# Altium PCB PD_v5.PcbDoc
Units mil, origin at the board's own origin, x right, y up, seen from the top; angles counter-clockwise.
Board outline 3309.8 x 1465 mil, 4 copper layers (Top Layer, VCC_3V3, VCC_1V2, Bottom Layer), stack 23.756 mil thick; 64 components, 57 nets, 236 pads, 225 vias.
Unrouted connection lines stored in the file: 171.
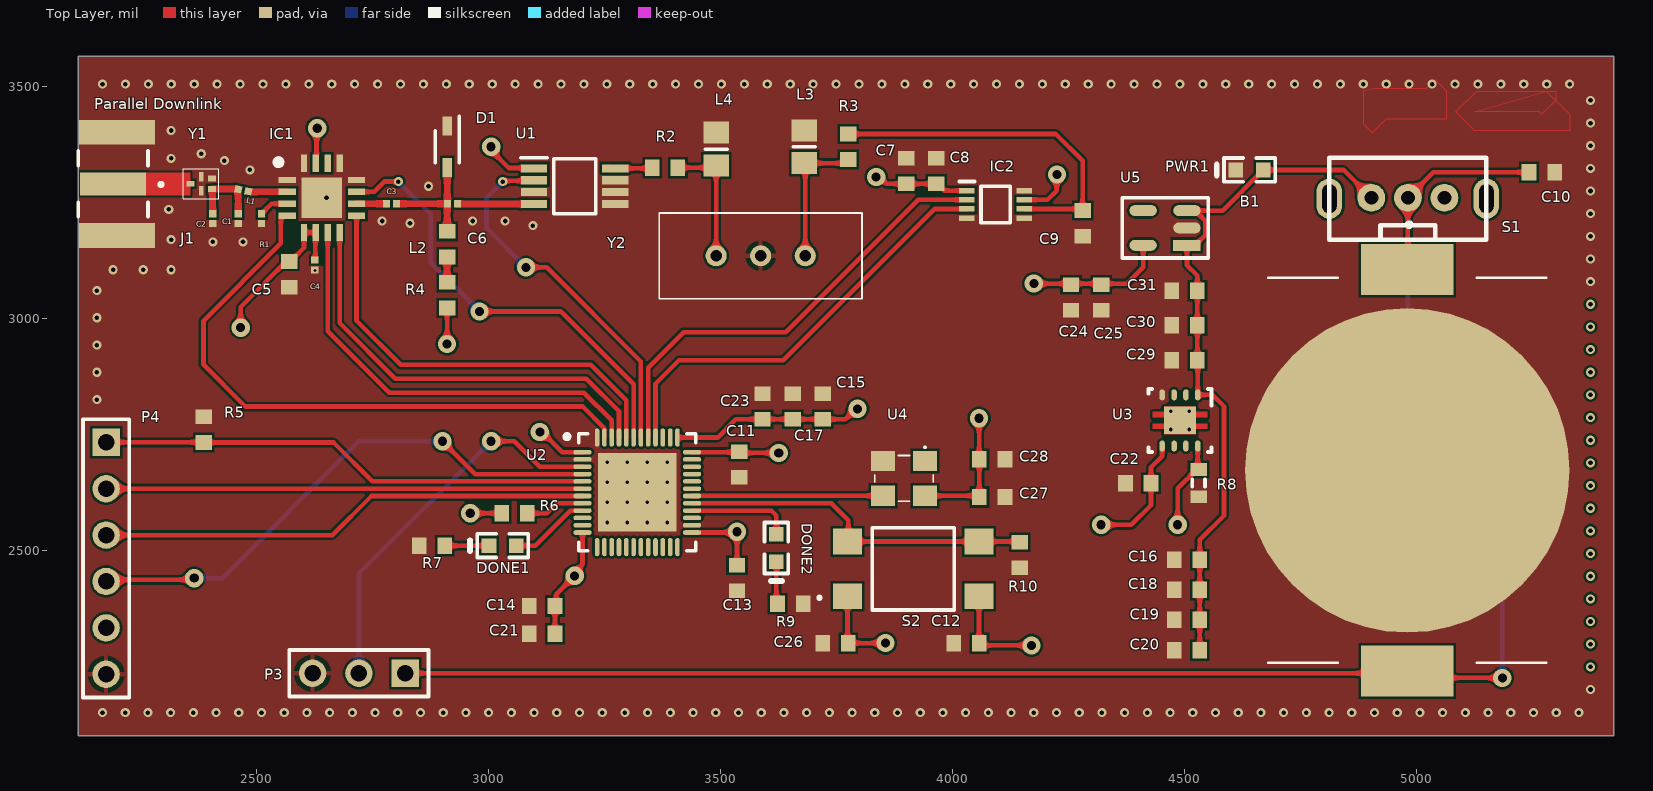
[diagram p0: Top Layer view]
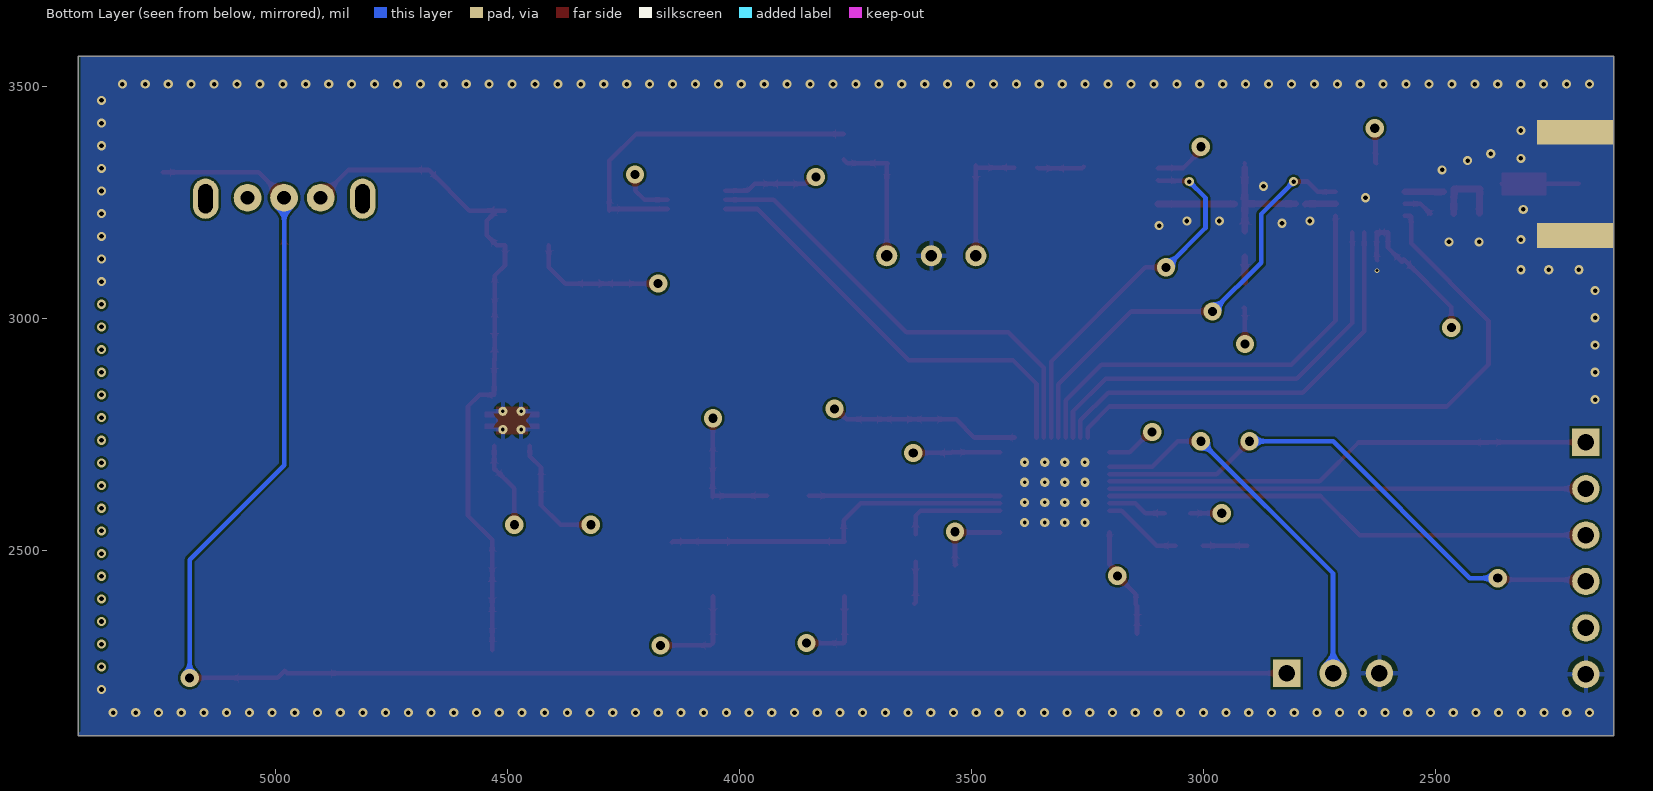
[diagram p1: Bottom Layer view, seen from below]
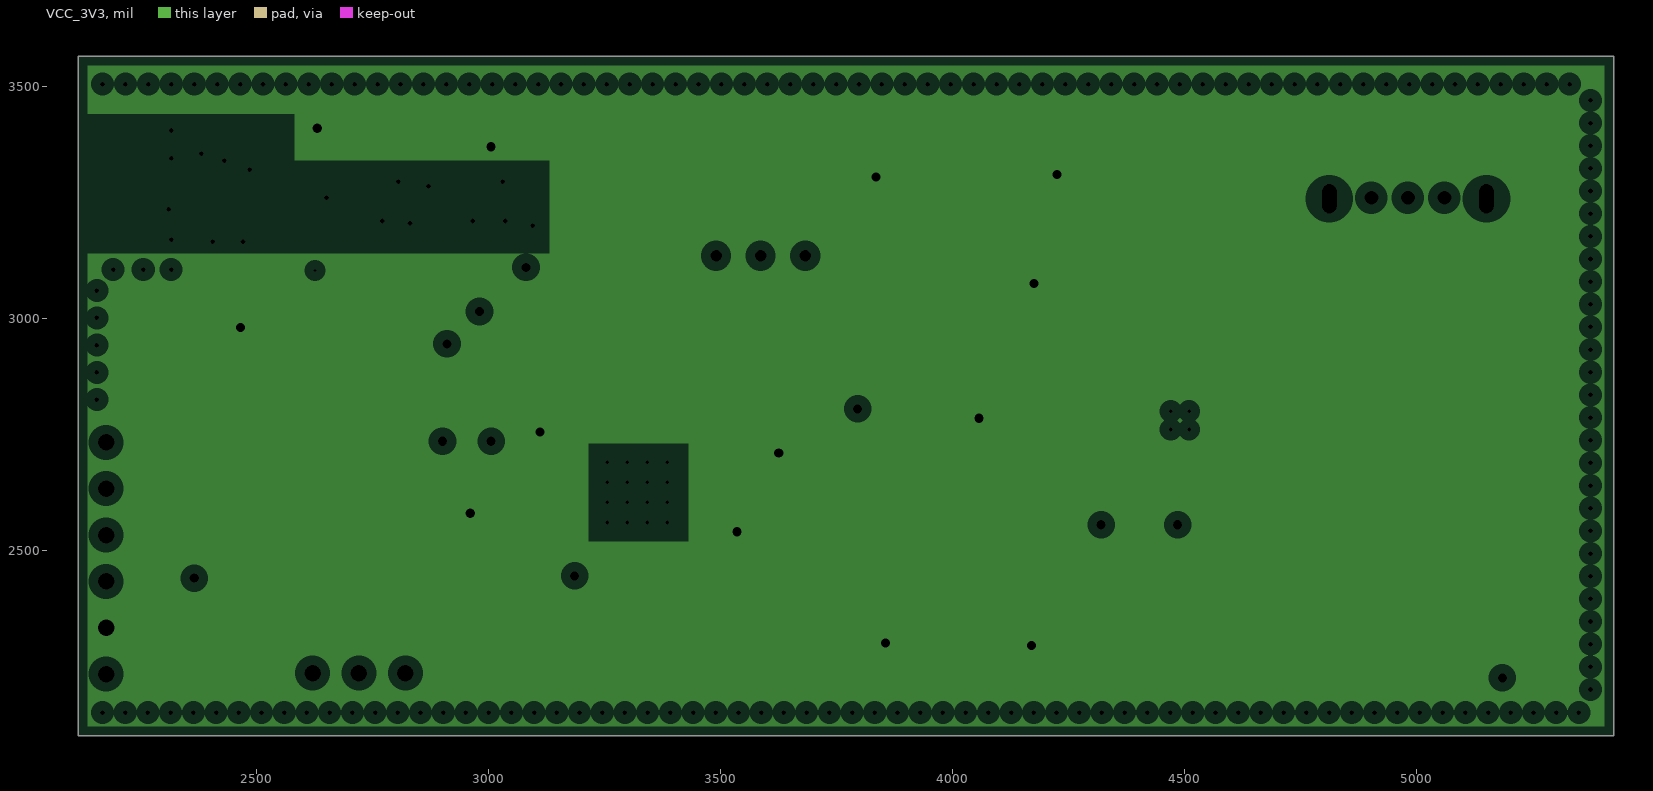
[diagram p2: VCC_3V3, clearances drawn from the general rule]
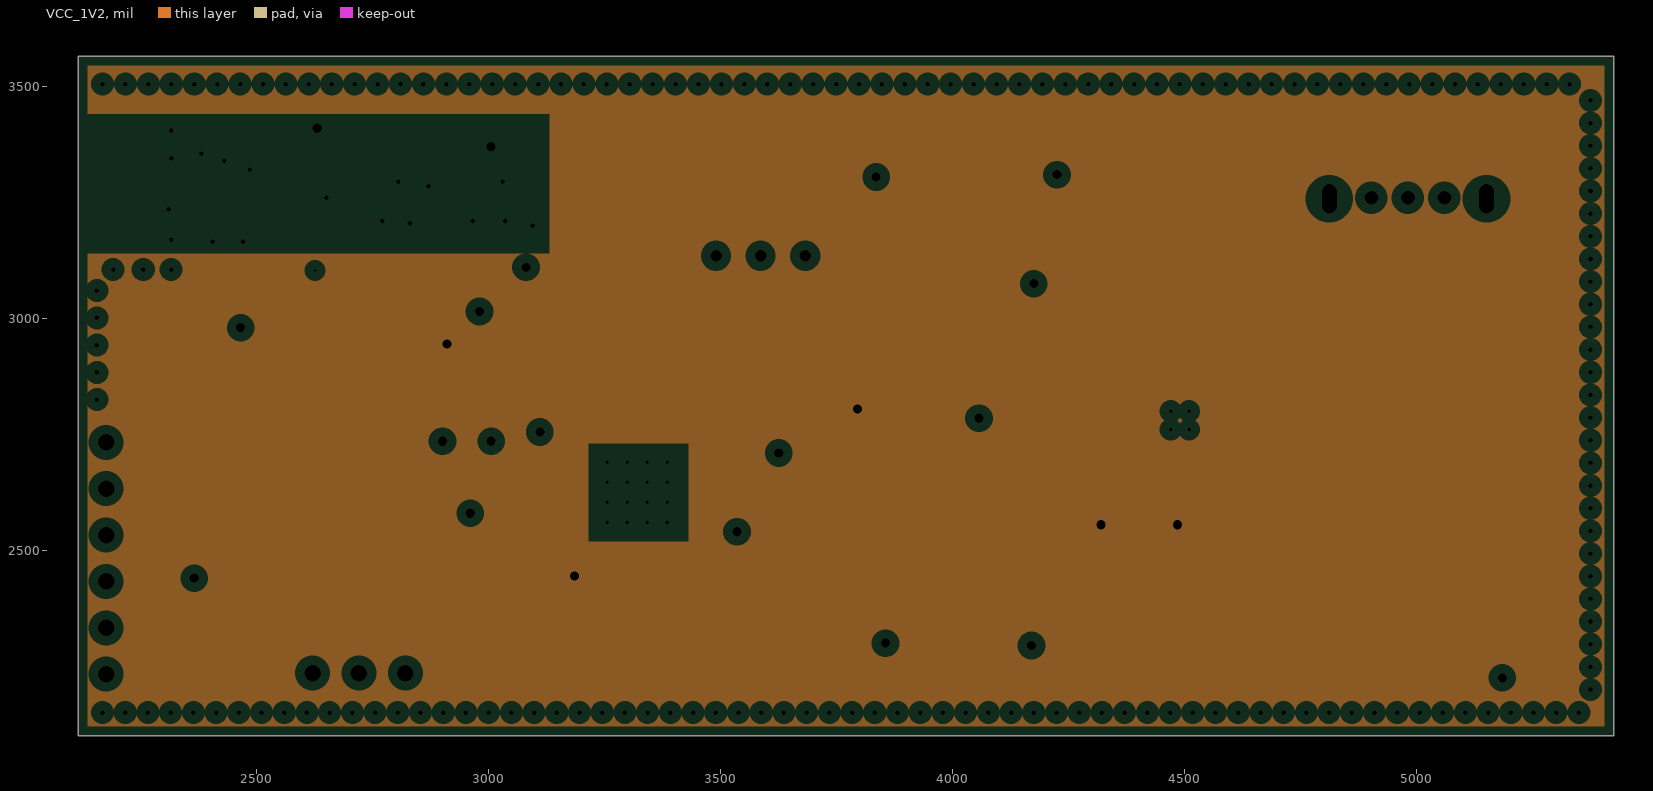
[diagram p3: VCC_1V2, clearances drawn from the general rule]

## Layer stack, top to bottom
Top Solder: solder mask 0.4, Solder Resist, Dk 3.5
Top Layer: signal copper 1.4
Dielectric 1: prepreg 2.8, PP-006, Dk 4.1
VCC_3V3: plane copper 1.378, net 3V3
Dielectric 2: dielectric 12.6, FR-4, Dk 4.8
VCC_1V2: plane copper 1.378, net 1V2
Dielectric 3: prepreg 2.8, PP-006, Dk 4.1
Bottom Layer: signal copper 1.4
Bottom Solder: solder mask 0.4, Solder Resist, Dk 3.5

## Board outline
2115.2,2100 2115.2,3565 5425,3565 5425,2100

## Design rules (kind name [scope] priority, off if disabled: settings)
Clearance Clearance_BD [InNetClass('RF')] p1: gap=3 ignorepadtopadclearanceinfootprint=TRUE
Clearance Clearance_1 [All] p2: gap=5 ignorepadtopadclearanceinfootprint=TRUE except(0: Arc-Hole Track-Hole SMDPad-Region SMDPad-Hole THPad-Region THPad-Hole Via-Hole Fill-Hole Poly-Hole Region-Hole Text-Hole)
HoleToHoleClearance [All] p1: gap=5 allowstackedmicrovias=TRUE
MinimumSolderMaskSliver [All] p1: minsoldermaskwidth=1
PlaneClearance [All] p1: clearance=20
PlaneConnect [All] p1: planeconnectstyle=Relief reliefexpansion=20 reliefentries=4 reliefconductorwidth=10 reliefairgap=10
PolygonConnect [All] p1: thpad.connectstyle=Relief thpad.reliefconductorwidth=10 thpad.reliefentries=4 thpad.polygonreliefangle="90 Angle" thpad.airgapwidth=10 smdpad.connectstyle=Direct smdpad.reliefconductorwidth=10 smdpad.reliefentries=4 smdpad.polygonreliefangle="90 Angle" smdpad.airgapwidth=10 via.connectstyle=Direct via.reliefconductorwidth=10 via.reliefentries=4 via.polygonreliefangle="90 Angle" via.airgapwidth=10
RoutingCorners [All] p1: cornerstyle=Round minsetback=100 maxsetback=100
RoutingVias [All] p1: holewidth=9.84 width=19.68 viastyle="Through Hole" minholewidth=9.84 minwidth=19.68 maxholewidth=28 maxwidth=50
SilkToSilkClearance [All] p1: silktosilkclearance=5
SilkToSolderMaskClearance [IsPad] p1: minsilkscreentomaskgap=0 clearancetoexposedcopper=TRUE
SolderMaskExpansion [All] p1: expansion=4 istentingtop=FALSE
UnRoutedNet [All] p1: checkbadconnections=TRUE
Width [All] p1: maxlimit=70 minlimit=10 preferedwidth=10 minimp=50.000000 maximp=50.000000 favimp=50.000000
22 further rules are at their usual default settings.

## Classes and differential pairs
component class io_bank: B1 C10 C11 C12 C13 C14 C15 C16 C17 C18 C19 C20 C21 C22 C23 C24 C25 C26 C27 C28 C29 C30 C31 DONE1 DONE2 P3 P4 PWR1 R5 R6 R7 R8 R9 R10 S1 S2 U2 U3 U4 U5
component class PD_v5: C1 C2 C3 C4 C5 C6 C7 C8 C9 D1 IC1 IC2 J1 L1 L2 L3 L4 R1 R2 R3 R4 U1 Y1 Y2

## Components (designator, comment, footprint, x,y, rotation, side; value= is the part's Value field where it differs from the comment)
B1 "BK-912-TR" MPD_BK-912-TR 4980,2672.52 r270 top
C1 "陶瓷电容" CAPC0603X33N 2460,3215 r90 top value=0.9pF
C2 "陶瓷电容" CAPC0603X33N 2405,3215 r90 top value=0.3pF
C3 "陶瓷电容" CAPC0603X33N 2790.16,3246.97 r0 top value=1pF
C4 "陶瓷电容" CAPC0603X33N 2625,3115 r90 top value=100nF
C5 "陶瓷电容" 1608[0603] 2570,3095 r270 top value=10uF
C6 "陶瓷电容" CAPC0603X33N 2921.62,3246.97 r0 top value=40pF
C7 "陶瓷电容" 1608[0603] 3900,3317.56 r90 top value=1uF
C8 "陶瓷电容" 1608[0603] 3965,3317.56 r90 top value=0.1uF
C9 "陶瓷电容" 1608[0603] 4280,3205 r270 top value=1.5nF
C10 "Cap" 1608[0603] 5270,3315 r180 top value=10uF
C11 "0.1μF" 1608[0603] 3540,2685 r90 top value=100pF
C12 "0.1μF" 1608[0603] 4030,2300 r0 top value=100pF
C13 "0.1μF" 1608[0603] 3535,2440 r90 top value=100pF
C14 "4.7μF" 1608[0603] 3115,2380 r0 top value=100pF
C15 "4.7μF" 1608[0603] 3720,2810 r270 top value=100pF
C16 "0.1μF" 1608[0603] 4505,2480 r0 top value=100pF
C17 "0.47μF" 1608[0603] 3655,2810 r270 top value=100pF
C18 "10μF" 1608[0603] 4505,2415 r0 top value=100pF
C19 "0.1μF" 1608[0603] 4505,2350 r0 top value=100pF
C20 "0.01μF" 1608[0603] 4505,2285 r0 top value=100pF
C21 "0.1μF" 1608[0603] 3115,2320 r0 top value=100pF
C22 "0.01μF" 1608[0603] 4400,2645 r0 top value=100pF
C23 "10μF" 1608[0603] 3590,2810 r270 top value=100pF
C24 "0.01μF" 1608[0603] 4255,3045 r90 top value=100pF
C25 "0.1μF" 1608[0603] 4320,3045 r90 top value=100pF
C26 "0.01μF" 1608[0603] 3747.44,2300 r0 top value=100pF
C27 "0.1μF" 1608[0603] 4085.12,2615 r180 top value=100pF
C28 "10μF" 1608[0603] 4085.12,2695.87 r180 top value=100pF
C29 "10μF" 1608[0603] 4500,2910 r0 top value=100pF
C30 "0.1μF" 1608[0603] 4500,2985 r0 top value=100pF
C31 "0.01μF" 1608[0603] 4500,3060 r0 top value=100pF
D1 "BAT1503WE6327" SOD2513X110N 2910.41,3370.26 r270 top
DONE1 "绿灯 0603" 0603_LED 3030,2510 r0 top
DONE2 "绿灯 0603" 0603_LED 3620,2505 r90 top
IC1 "nRF21540-QDAA-R" QFN65P400X400X90-17N-D 2640,3260 r0 top
IC2 "ADS7040IDCUR" SOP50P310X90-8N 4092.69,3245.79 r0 top
J1 "SMA-J-P-H-ST-EM1" SAMTEC_SMA-J-P-H-ST-EM1 2190,3290 r270 top
L1 "Inductor" CAPC0603X33N 2470.63,3275.82 r348 top value=1.9nH
L2 "Inductor" 1608[0603] 2910,3160 r270 top value=10.0uH
L3 "Inductor" 6-0805_N 3680,3370 r90 top value=10uH
L4 "Inductor" 6-0805_N 3490,3365 r90 top value=4.7uH
P3 "Header 3" HDR1X3 2820,2235 r180 top
P4 "Header 6" HDR1X6 2175,2732.87 r270 top
PWR1 "红灯 0603" 0603_LED 4640,3320 r0 top
R1 "电阻" CAPC0603X33N 2510,3215 r90 top value=50
R2 "电阻" 1608[0603] 3380,3325 r180 top value=0
R3 "电阻" 1608[0603] 3775,3370 r270 top value=0
R4 "电阻" 1608[0603] 2910,3050 r90 top value=700
R5 "4.7k" 1608[0603] 2385,2760 r270 top value=1K
R6 "4.7k" 1608[0603] 3055,2580 r0 top value=1K
R7 "1k Ohm" 1608[0603] 2877.44,2510 r0 top value=1k
R8 "Res3" J1-0603 4530,2645 r270 top value=1M
R9 "1k Ohm" 1608[0603] 3650,2385 r180 top value=1k
R10 "1k Ohm" 1608[0603] 4145,2490 r90 top value=1M
S1 "SW-SPDT" SW_SPDT 4981.26,3260 r180 top
S2 "TL3305AF160QG" TL3305AF160QG 3915,2460 r0 top
U1 "ADG902BRMZ" SOP65P490X110-8N 3185,3285 r0 top
U2 "GW1N-LV4QN48C6" QFN40P600X600X60_HS-49N 3320,2625 r0 top
U3 "TPS715A01DRBR" DRB0008A 4490,2780 r270 top
U4 "ASTX_H11_20MHz" ASTXH1124576MHZT 3895,2660 r180 top
U5 "TPS73633" TPS73633 4505,3157.6 r180 top
Y1 "TA2238A" TA2238A 2356.87,3290.26 r0 top
Y2 "ECS-10.7-7.5B" ECS10775A 3490,3135 r0 top

## Footprints (in the part's own frame and the unit in brackets; to place one, negate y for a bottom-side part, rotate by r counter-clockwise, add the part's x,y. Pads: shape width x height; smd on the part's side, far side on the other; paste and mask are expansions set on the pad)
6-0805_N [mm] "Chip Resistor, Body 2.0x1.2mm, IPC Medium Density"
  rect 1.2x1.4 smd: 1(-0.9,0) 2(0.9,0)
  silkscreen extent 0,-0.6 0,0.6, body extent -1.07,-0.7 1.07,0.7, height 0.7
0603_LED [mm]
  rect 0.8x0.8 smd: A(0.75,0) K(-0.75,0)
  silkscreen extent -1.8,-0.65 1.4,0.65
1608[0603] [mm] "Chip Capacitor, Body 1.6x0.8mm, IPC High Density"
  rect 0.8x0.9 smd: 1(-0.7,0) 2(0.7,0)
  body extent -0.87,-0.48 0.87,0.48, height 1.3
ASTXH1124576MHZT [mm]
  rect 1.3x1.1 smd: 1(-1.15,-0.825) 2(1.15,-0.825) 3(1.15,1.075) 4(-1.15,1.075)
  silkscreen extent -1.6,-1.62 1.6,1.38, body extent -1.69,-1.26 1.69,1.52, height 1.1
CAPC0603X33N [mm]
  rect 0.39x0.4 smd: 1(-0.272,0) 2(0.272,0)
DRB0008A [mm]
  oval 0.6x0.3 smd paste+0 mask+0.051: 1(-1.4,0.975) 2(-1.4,0.325) 3(-1.4,-0.325) 4(-1.4,-0.975) 5(1.4,-0.975) 6(1.4,-0.325) 7(1.4,0.325) 8(1.4,0.975)
  rect 1.5x1.75 smd paste-0.862 mask+0.051: 9(0,0)
  round 0.5 hole 0.203 mask+0.051: V(-0.5,0.5) V(-0.5,-0.5) V(0.5,0.5) V(0.5,-0.5)
  Top Layer region: -0.185,-1.5 -0.465,-1.5 -0.465,-0.875 -0.75,-0.875 -0.75,0.875 -0.465,0.875 -0.465,1.5 -0.185,1.5 -0.185,0.875 0.185,0.875 0.185,1.5 0.465,1.5 0.465,0.875 0.75,0.875 0.75,-0.875 0.465,-0.875 0.465,-1.5 0.185,-1.5 0.185,-0.875 -0.185,-0.875
  silkscreen extent -1.73,-1.73 1.73,1.73, body extent 0,0 0.25,0.25, height 0.25
ECS10775A [mm]
  round 1.155 hole 0.63: 1(0,0) 2(2.44,0) 3(4.88,0)
  silkscreen extent -3.11,-2.35 7.99,2.35, body extent -3.11,-2.35 7.99,2.35, height 11.3
HDR1X3 [mm] "Connector; Header; 3 Position"
  rect 1.5x1.5 hole 0.9: 1(0,0)
  round 1.5 hole 0.9: 2(2.54,0) 3(5.08,0)
  silkscreen extent -1.27,-1.27 6.35,1.27
HDR1X6 [mm] "Connector; Header; 6 Position"
  rect 1.5x1.5 hole 0.9: 1(0,0)
  round 1.5 hole 0.9: 2(2.54,0) 3(5.08,0) 4(7.62,0) 5(10.16,0) 6(12.7,0)
  silkscreen extent -1.27,-1.27 13.97,1.27
J1-0603 [mm] "Chip Resistor, Body 1.6x0.8mm, IPC High Density"
  rect 0.7x0.9 smd: 1(-0.75,0) 2(0.75,0)
  silkscreen extent -0.2,-0.35 0.2,0.35, body extent -0.85,-0.48 0.85,0.48, height 0.9
MPD_BK-912-TR [mm]
  rect 2.79x5.08 smd: 1(-10.985,0) 2(10.985,0)
  round 17.78 smd: 3(0,0)
  silkscreen extent -13.59,-7.62 10.54,7.62, body extent -11.43,-7.62 11.43,7.8
QFN40P600X600X60_HS-49N [mm] "QFN, 48-Leads, Body 6.00x6.00mm, Pitch 0.40mm, Thermal Pad 4.63x4.63mm, IPC Medium Density"
  oval 1x0.25 smd: 1(-3,2.2) 2(-3,1.8) 3(-3,1.4) 4(-3,1) 5(-3,0.6) 6(-3,0.2) 7(-3,-0.2) 8(-3,-0.6) 9(-3,-1) 10(-3,-1.4) 11(-3,-1.8) 12(-3,-2.2) 25(3,-2.2) 26(3,-1.8) 27(3,-1.4) 28(3,-1) 29(3,-0.6) 30(3,-0.2) 31(3,0.2) 32(3,0.6) 33(3,1) 34(3,1.4) 35(3,1.8) 36(3,2.2)
  oval 0.25x1 smd: 13(-2.2,-3) 14(-1.8,-3) 15(-1.4,-3) 16(-1,-3) 17(-0.6,-3) 18(-0.2,-3) 19(0.2,-3) 20(0.6,-3) 21(1,-3) 22(1.4,-3) 23(1.8,-3) 24(2.2,-3) 37(2.2,3) 38(1.8,3) 39(1.4,3) 40(1,3) 41(0.6,3) 42(0.2,3) 43(-0.2,3) 44(-0.6,3) 45(-1,3) 46(-1.4,3) 47(-1.8,3) 48(-2.2,3)
  rect 4.3x4.3 smd: 49(0,0)
  silkscreen extent -3.97,-3.2 3.2,3.2, body extent -3.05,-3.05 3.05,3.05, height 0.6
QFN65P400X400X90-17N-D [mm]
  rect 0.95x0.35 smd: 1(-1.9,0.975) 2(-1.9,0.325) 3(-1.9,-0.325) 4(-1.9,-0.975) 9(1.9,-0.975) 10(1.9,-0.325) 11(1.9,0.325) 12(1.9,0.975)
  rect 0.35x0.95 smd: 5(-0.975,-1.9) 6(-0.325,-1.9) 7(0.325,-1.9) 8(0.975,-1.9) 13(0.975,1.9) 14(0.325,1.9) 15(-0.325,1.9) 16(-0.975,1.9)
  rect 2.2x2.2 smd: 17(0,0)
  silkscreen extent -2.54,1.79 -2.21,2.11, body extent -2.05,-2.05 2.05,2.05, height 0.9
SAMTEC_SMA-J-P-H-ST-EM1 [mm]
  rect 1.27x3.6 smd: 1(0,0)
  rect 1.35x4.2 smd: 2_1(-2.825,0.2) 3_1(2.825,0.2)
  rect 1.35x4.2 smd far side: 2_2(-2.825,0.2) 3_2(2.825,0.2)
  silkscreen extent -1.8,-1.9 1.8,2.72
SOD2513X110N [mm]
  rect 1.05x0.5 smd: 1(-1.138,0) 2(1.138,0)
  silkscreen extent -1.66,-0.65 0.87,0.65, body extent -1.25,-0.65 1.25,0.65, height 1.1
SOP50P310X90-8N [mm]
  rect 0.85x0.3 smd: 1(-1.575,0.75) 2(-1.575,0.25) 3(-1.575,-0.25) 4(-1.575,-0.75) 5(1.575,-0.75) 6(1.575,-0.25) 7(1.575,0.25) 8(1.575,0.75)
  silkscreen extent -2,-1 0.8,1.25, body extent -1.55,-1 1.55,1, height 0.77
SOP65P490X110-8N [mm]
  rect 1.45x0.45 smd: 1(-2.225,0.975) 2(-2.225,0.325) 3(-2.225,-0.325) 4(-2.225,-0.975) 5(2.225,-0.975) 6(2.225,-0.325) 7(2.225,0.325) 8(2.225,0.975)
  silkscreen extent -2.95,-1.5 1.15,1.55, body extent -2.45,-1.5 2.45,1.5, height 1.1
SW_SPDT [mm]
  oval 1.4x2.2 hole 0.8 slot 1.6 at 90 deg: 0(-4.3,0.05) 0(4.3,0.05)
  round 1.524 hole 0.762: 1(-2,0) 2(0,0) 3(2,0)
  silkscreen extent -4.3,-2.2 4.3,2.3, body extent -4.25,-1.9 4.25,1.8, height 6.5
TA2238A [mm] "TA2238A"
  rect 0.425x0.325 smd: 1(0,0) 4(1.175,0.288) 5(1.175,-0.288)
  rect 0.25x0.525 smd: 2(0.587,0.387) 3(0.587,-0.387)
  silkscreen extent -0.4,-0.82 1.55,0.82
TL3305AF160QG [mm]
  rect 1.6x1.4 smd: 1(-3.6,-1.5) 2(3.6,-1.5) 3(-3.6,1.5) 4(3.6,1.5)
  silkscreen extent -5.21,-2.25 2.25,2.25
TPS73633 [mm]
  rect 1.5x0.6 smd: 1(0,0)
  oval 1.5x0.6 smd: 2(0,-0.95) 3(0,-1.9) 4(2.4,-1.9) 5(2.4,0)
  silkscreen extent -1.17,-2.6 3.55,0.7

## Part data
B1: "No Description Available", VALUE_2=Value, Built_By=EMA_Cory, Copyright="Copyright (C) 2018 Accelerated Designs. All rights reserved", Datasheet=https://www.memoryprotectiondevices.com/datasheets/BK-912-datasheet.pdf, Manufacturer_Part_Number=BK-912-TR, RefDes=RefDes, SourceLibrary=Memory_Protection_Devices_2020-01-22, Type=DEV, Vendor="Memory Protection Devices, Inc"
C1 C2 C3 C4 C5 C6 C7 C8 C9: "Capacitor (Semiconductor SIM Model)", LatestRevisionDate=29-May-2009, LatestRevisionNote="IPC-7351 Footprint Added.", PackageDescription="Chip Capacitor", PackageReference=C1206, Published=8-Jun-2000, Publisher="Altium Limited"
C10: "Capacitor", LatestRevisionDate=17-Jul-2002, LatestRevisionNote="Re-released for DXP Platform.", PackageDescription="Radial Cap, Thru-Hole; 2 Leads; 0.3 in Pin Spacing", PackageReference=RAD-0.3, Published=8-Jun-2000, Publisher="Altium Limited"
C11 C12 C13 C14 C15 C16 C17 C19 C21 C25 C27 C30: library part CAP_2, "MLCCs", LatestRevisionDate=17-Jul-2002, LatestRevisionNote="Re-released for DXP Platform.", PackageDescription="Radial Cap, Thru-Hole; 2 Leads; 0.3 in Pin Spacing", PackageReference=RAD-0.3, Published=8-Jun-2000, Publisher="Altium Limited"
C18 C23 C28 C29: library part CAP_4, "MLCCs", LatestRevisionDate=17-Jul-2002, LatestRevisionNote="Re-released for DXP Platform.", PackageDescription="Radial Cap, Thru-Hole; 2 Leads; 0.3 in Pin Spacing", PackageReference=RAD-0.3, Published=8-Jun-2000, Publisher="Altium Limited"
C20 C22 C24 C26 C31: library part CAP_3, "MLCCs", LatestRevisionDate=17-Jul-2002, LatestRevisionNote="Re-released for DXP Platform.", PackageDescription="Radial Cap, Thru-Hole; 2 Leads; 0.3 in Pin Spacing", PackageReference=RAD-0.3, Published=8-Jun-2000, Publisher="Altium Limited"
D1: "Diode", Manufacturer_Name=Infineon, Datasheet Link=http://uk.rs-online.com/web/p/products/6532351, Height=1.1mm, Manufacturer_Part_Number=BAT1503WE6327
DONE1 DONE2: library part "0603 绿灯", "发光二极管", Package=0603, SuppliersPartNumber=C72043, ComponentLink1Description=供应商链接, ComponentLink1URL=http://www.szlcsc.com/product/details_73152.html, Supplier=LC
IC1: "Integrated Circuit", Manufacturer_Name="Nordic Semiconductor", Mouser Part Number=949-NRF21540-QDAA-R, Datasheet Link=https://www.mouser.com/datasheet/2/297/nRF21540_OPS_v0.5.2-1699339.pdf, Height=0.9mm, Manufacturer_Part_Number=nRF21540-QDAA-R, Mouser Price/Stock=https://www.mouser.co.uk/ProductDetail/Nordic-Semiconductor/nRF21540-QDAA-R?qs=xZ%2FP%252Ba9zWqaQBa1ysoqtQg%3D%3D
IC2: "Integrated Circuit", Manufacturer_Name="Texas Instruments", Mouser Part Number=595-ADS7040IDCUR, Arrow Part Number=ADS7040IDCUR, Arrow Price/Stock=https://www.arrow.com/en/products/ads7040idcur/texas-instruments, Datasheet Link=http://www.ti.com/lit/gpn/ads7040, Height=0.9mm, Manufacturer_Part_Number=ADS7040IDCUR, Mouser Price/Stock=https://www.mouser.co.uk/ProductDetail/Texas-Instruments/ADS7040IDCUR?qs=pqSajtDZXRUnGgXj5Qrp4Q%3D%3D
J1: "SMA Connector Jack, Female Socket 50Ohm Board Edge, End Launch Solder", Package=None, Digi-Key_Part_Number=SAM8857-ND, MF=Samtec, MP=SMA-J-P-H-ST-EM1, SnapEDA_Link=https://www.snapeda.com/parts/SMA-J-P-H-ST-EM1/Samtec%20Inc./view-part/134500/?ref=snap, Toby_UK-Purchase-URL=https://snapeda.com/shop?store=Toby+UK&id=134500
P3: "Header, 3-Pin", LatestRevisionDate=17-Jul-2002, LatestRevisionNote="Re-released for DXP Platform.", Publisher="Altium Limited"
P4: "Header, 6-Pin", LatestRevisionDate=17-Jul-2002, LatestRevisionNote="Re-released for DXP Platform.", Publisher="Altium Limited"
PWR1: library part "0603 红灯", "发光二极管", Package=0603, SuppliersPartNumber=C2286, ComponentLink1Description=供应商链接, ComponentLink1URL=http://www.szlcsc.com/product/details_2659.html, Supplier=LC
R1 R2 R3 R4 R8: "Resistor", LatestRevisionDate=29-May-2009, LatestRevisionNote="IPC-7351 Footprint Added.", PackageDescription="Chip Resistor", PackageReference=J1-0603, Published=8-Jun-2000, Publisher="Altium Limited"
R5 R6: library part RES_1, "Resistor", LatestRevisionDate=17-Jul-2002, LatestRevisionNote="Re-released for DXP Platform.", PackageDescription="Axial Device, Thru-Hole; 2 Leads; 0.3 in Pin Spacing", PackageReference=AXIAL-0.3, Published=8-Jun-2000, Publisher="Altium Limited"
R7 R9 R10: library part Res, "Chip Resistor (Surface Mount)", Manufacturer="Generic Chip Res (TBD)"
S1: "Single Pole Double Throw Subminiature Toggle Switch, Right Angle Mounting, Vertical Actuation", ComponentLink1Description="Manufacturer Link", ComponentLink1URL=http://www.apem.com, DatasheetDocument=05-Dec-2000, LatestRevisionDate=17-Dec-2003, LatestRevisionNote="Schematic revised, PCB Footprint replaced.", PackageReference=TL36WW15050, Published=24-Mar-1999, Publisher="Altium Limited"
S2: "Switch", Manufacturer_Name=E-Switch, Mouser2 Part Number=612-TL3305AF160QG, Datasheet Link=https://componentsearchengine.com//TL3305AF160QG.pdf, Manufacturer_Part_Number=TL3305AF160QG, Mouser2 Price/Stock=https://www.mouser.com/Search/Refine.aspx?Keyword=612-TL3305AF160QG
U1: library part ADG901BRMZ, "RF Switch, Wideband, 40 dB Isolation at 1 GHz, CMOS 1.65 V to 2.75 V, SPST Switches, RM-8, Pb-Free, 50 Tube", Off Isolation Test Freq=1G, Supply Voltage="Single (+1.65V to +2.75V)", # Sw Functions=1, Bandwidth=4.5GHz, Code_JEDEC=MO-187-AA, ComponentLink1Description="Manufacturer URL", ComponentLink1URL=www.analog.com, ComponentLink2Description=Datasheet, ComponentLink2URL=http://www.analog.com/static/imported-files/data_sheets/ADG901_902.pdf, ComponentLink3Description="Package Specification", ComponentLink3URL=http://www.analog.com/static/imported-files/packages/PKG_PDF/MSOP%28RM%29/RM_8.pdf, Configuration=SPST/NO, DatasheetVersion=RevB, Insertion Loss (dB)=800mdB, Off Isolation=37dB, P-1dB (dBm)=17, PackageDescription="8-Lead Mini Small Outline Package [MSOP]", PackageReference=RM-8, PackageVersion=Aug-2005
U3: "No Description Available", Alternate_PartNumber=TPS715A01DRBT, Manufacturer="Texas Instruments", CompType=IC, Copyright="Copyright (C) 2021 Ultra Librarian. All rights reserved.", Manufacturer_Part_Number=TPS715A01DRBR, Mfr_Name="Texas Instruments", MountType=SMT, PackageReference=DRB0008A, PartNumber=TPS715A01DRBR, RefDes=RefDes, RoHS=Y, Type=DEV
Y2: library part ECS-10.7-7.5A, "Crystal or Oscillator", Manufacturer_Name=ECS, Mouser Part Number=520-107-7.5A, Arrow Part Number=ECS-10.7-7.5A, Arrow Price/Stock=https://www.arrow.com/en/products/ecs-10.7-7.5a/ecs-international, Datasheet Link="http://www.ecsxtal.com/store/pdf/mono crystal filters.pdf", Height=11.2mm, Manufacturer_Part_Number=ECS-10.7-7.5A, Mouser Price/Stock=https://www.mouser.co.uk/ProductDetail/ECS/ECS-107-75A?qs=A5Qiz0JZgg4zSHI1UHphaA%3D%3D
L1 L2 L3 L4: Code_IEC=1005, Code_JEITA=0402, LatestRevisionDate=29-May-2009, LatestRevisionNote="IPC-7351 Footprint Added.", PackageDescription="Chip Inductor", PackageReference=0402-A, Published=8-Jun-2000, Publisher="Altium Limited"

## Via types
v1: diameter 19.68, hole 9.84, Top Layer to Bottom Layer, 184 vias
v2: diameter 39.37, hole 19.68, Top Layer to Bottom Layer, 24 vias
v3: diameter 19.68, hole 7.87, Top Layer to Bottom Layer, 16 vias
v4: diameter 10, hole 6, Top Layer to Bottom Layer, 1 vias

## Nets (pads, with @x,y where several pads share a name; then routed paths per layer and width w, separated by ;. In a path a pad name is that pad's centre, name@x,y a point inside that pad or via, vN(x,y) a via of type N, cw(c..) or ccw(c..) an arc to the next point about the centre after c; other vN are vias at no path point)
1V2: C14.2 C15.2 C17.2 C21.2 C22.2 C23.2 R4.1 R8.1 U2.12 U2.37 U3.5 U3.8 | length 1188.3
  Top Layer w10: v2(2910,2945) R4.1 R4.1@2911.97,3022.44 ; C21.2 C14.2 3145,2382.44 3145,2405 v2(3185,2445) 3185,2452.95 3201.89,2469.84 U2.12 ; U2.37 3493.11,2743.11 3532.44,2782.44 C23.2 C17.2 C15.2 3768.51,2782.44 3791.07,2805 v2(3795,2805) ; v2(4320,2555) 4385,2555 4427.56,2597.56 C22.2 4427.56,2679.14 4451.61,2703.19 U3.5 ; v2(4485,2555) 4485,2633.46 4525.71,2674.17 4528.39,2674.17 U3.8
3V3: C4.2 C5.1 C7.1 C8.1 C11.2 C12.2 C13.2 C24.2 C25.2 C26.2 C27.2 C28.2 IC1.5 IC1.6 IC1.15 IC2.1 IC2.7 P4.5 R6.1 S2.1 S2.2 U1.1 U2.1 U2.25 U2.36 U4.4 U5.5 | length 2398.1
  Top Layer w10: v2(2465,2980) 2465,3024.53 C5.1@2568.03,3127.56 ; C5.1@2580.23,3132.79 C5.1 2571.97,3122.56 2601.61,3152.2 IC1.5 IC1.6 2626.1,3184.09 2626.1,3126.81 C4.2 ; IC1.15 2628.6,3336.2 2628.6,3408.6 v2(2630,3410) ; v2(2960,2580) R6.1 ; v2(3005,3370) 3005,3362.05 3042.86,3324.19 3096.59,3324.19 U1.1 ; v2(3110,2755) 3115,2755 3158.39,2711.61 U2.1 ; U2.25 3438.19,2538.46 3533.46,2538.46 v2(3535,2540) C13.2@3535,2472.56 ; U2.36 3539.05,2711.61 C11.2 3542.56,2710 v2(3625,2710) ; C13.2@3532.6,2469.96 C13.2 ; S2.1 3773.27,2301.73 C26.2 v2(3855,2300) ; v2(3835,3305) 3842.95,3305 3857.95,3290 C7.1 C8.1 3966.97,3290 3981.65,3275.32 IC2.1 ; U4.4 4054.88,2617.68 C27.2 C28.2 4056.91,2696.51 v2(4056.91,2784.75) ; S2.2 4056.73,2300.83 C12.2 4062.56,2295 v2(4170,2295) ; IC2.7 4204.36,3255.64 4224.04,3275.31 4224.04,3309.04 v2(4225,3310) ; v2(4175,3075) 4375,3075 4410.51,3110.51 U5.5
GND: B1.3 C1.1 C2.1 C4.1 C5.2 C7.2 C8.2 C9.2 C10.1 C11.1 C12.1 C13.1 C14.1 C15.1 C16.1 C17.1 C18.1 C19.1 C20.1 C21.1 C22.1 C23.1 C24.1 C25.1 C26.1 C27.1 C28.1 C29.1 C30.1 C31.1 D1.1 IC1.1 IC1.12 IC1.13 IC1.16 IC1.17 IC2.4 IC2.5 IC2.8 J1.2_1 J1.2_2 J1.3_1 J1.3_2 L3.2 L4.2 P3.3 P4.6 PWR1.K R1.1 R5.1 R7.1 R8.2 R9.1 R10.1 U1.3 U1.5 U1.6 U1.7 U2.2 U2.26 U2.48 U2.49 U3.4 U3.9 U3.V U4.2 U5.2 Y1.2 Y1.3 Y1.4 Y2.2
  other v1: 2167.2,2150 2216.17,2150 2265.14,2150 2314.1,2150 2363.07,2150 2412.03,2150 2461,2150 2509.97,2150 2558.93,2150 2607.9,2150 2656.86,2150 2705.83,2150 2754.8,2150 2803.76,2150 2852.73,2150 2901.7,2150 2950.66,2150 2999.63,2150 3048.59,2150 3097.56,2150 3146.53,2150 3195.49,2150 3244.46,2150 3293.42,2150 3342.39,2150 3391.36,2150 3440.32,2150 3489.29,2150 3538.25,2150 3587.22,2150 3636.19,2150 3685.15,2150 3734.12,2150 3783.08,2150 3832.05,2150 3881.02,2150 3929.98,2150 3978.95,2150 4027.92,2150 4076.88,2150 4125.85,2150 4174.81,2150 4223.78,2150 4272.75,2150 4321.71,2150 4370.68,2150 4419.64,2150 4468.61,2150 4517.58,2150 4566.54,2150 4615.51,2150 4664.47,2150 4713.44,2150 4762.41,2150 4811.37,2150 4860.34,2150 4909.31,2150 4958.27,2150 5007.24,2150 5056.2,2150 5105.17,2150 5154.14,2150 5203.1,2150 5252.07,2150 5301.03,2150 5350,2150 5375,2200 2155,2825 2155,2883.75 2155,2942.5 2155,3001.25 2155,3060 5375,3079.23 2190,3105 2255,3105 2315,3105 5375,3128.08 2405,3165 2470,3165 2315,3170 5375,3176.92 3095,3200 2830,3205 2770,3210 2965,3210 3035,3210 5375,3225.77 2310,3235 2650,3260 5375,3274.61 2870,3285 2485,3320 5375,3323.46 2430,3340 2315,3345 2380,3355 5375,3372.31 2315,3405 5375,3421.15 5375,3470 2167.2,3505 2216.62,3505 2266.04,3505 2315.46,3505 2364.88,3505 2414.3,3505 2463.72,3505 2513.13,3505 2562.55,3505 2611.97,3505 2661.39,3505 2710.81,3505 2760.23,3505 2809.65,3505 2859.06,3505 2908.48,3505 2957.9,3505 3007.32,3505 3056.74,3505 3106.16,3505 3155.58,3505 3204.99,3505 3254.41,3505 3303.83,3505 3353.25,3505 3402.67,3505 3452.09,3505 3501.51,3505 3550.92,3505 3600.34,3505 3649.76,3505 3699.18,3505 3748.6,3505 3798.02,3505 3847.44,3505 3896.85,3505 3946.27,3505 3995.69,3505 4045.11,3505 4094.53,3505 4143.95,3505 4193.37,3505 4242.78,3505 4292.2,3505 4341.62,3505 4391.04,3505 4440.46,3505 4489.88,3505 4539.3,3505 4588.71,3505 4638.13,3505 4687.55,3505 4736.97,3505 4786.39,3505 4835.81,3505 4885.23,3505 4934.65,3505 4984.06,3505 5033.48,3505 5082.9,3505 5132.32,3505 5181.74,3505 5231.16,3505 5280.58,3505 5329.99,3505
  other v3: 3255.04,2560.04 3298.35,2560.04 3341.65,2560.04 3384.96,2560.04 3255.04,2603.35 3298.35,2603.35 3341.65,2603.35 3384.96,2603.35 3255.04,2646.65 3298.35,2646.65 3341.65,2646.65 3384.96,2646.65 3255.04,2689.96 3298.35,2689.96 3341.65,2689.96 3384.96,2689.96
  other v4: 2625.16,3103.07
JTAGSEL3N: P3.2 U2.3 | length 837.7
  Top Layer w10: v2(3005,2735) 3055,2735 3109.88,2680.12 U2.3
  Bottom Layer w10: P3.2 2720,2450 v2(3005,2735)
NetC1_2: C1.2 C2.2 L1.1 Y1.5 | length 160.4
  Top Layer w10: Y1.5 Y1.5@2404.07,3278 ; C2.2@2404.07,3226.64 C2.2 ; L1.1@2459.29,3275 L1.1@2459.65,3274.65 ; C1.2@2459.65,3226.06 C1.2
  Top Layer w14.5: Y1.5 L1.1@2459.92,3278.94 ; C2.2@2404.07,3226.64 Y1.5@2404.07,3278 ; C1.2@2459.65,3226.06 L1.1@2459.65,3274.65
NetC3_1: C3.1 IC1.10 | length 65.4
  Top Layer w14: IC1.10 IC1.10@2714.88,3247.13 ; C3.1@2773,3247.13 2773.14,3247 2778.99,3247 2779.66,3246.32 C3.1@2779.66,3246.12
  Top Layer w14.5: IC1.10@2714.88,3247.13 C3.1@2773,3247.13
NetC3_2: C3.2 C6.1 D1.2 L2.1 | length 248.5
  Top Layer w10: C3.2@2800.71,3245 C3.2@2800.87,3245 ; C6.1@2909.44,3246.17 C6.1@2911.41,3244.2 ; L2.1 L2.1@2910.12,3187.68 ; D1.2@2910,3325.2 D1.2@2910.45,3324.74 ; D1.2@2910,3334.57 D1.2@2910.12,3334.45 ; C6.1@2910.45,3247.43 C6.1
  Top Layer w14: C6.1@2910.12,3243.6 C6.1@2910.12,3245
  Top Layer w14.5: C3.2 C6.1@2910.12,3246.97 ; L2.1@2910.12,3187.68 C6.1@2910.12,3243.6 ; C6.1@2910.45,3247.43 D1.2@2910.45,3324.74
NetC6_2: C6.2 U1.4 | length 165.2
  Top Layer w10: C6.2 C6.2@2932.5,3246.79 ; U1.4@3097.22,3246.79 U1.4
  Top Layer w14.5: C6.2@2932.5,3246.79 U1.4@3097.22,3246.79
NetC9_1: C9.1 IC2.6 R3.1 | length 760.2
  Top Layer w10: R3.1 4222.44,3397.56 4280,3340 C9.1@4280,3235.32 ; IC2.6 4276.61,3235.95 C9.1
NetDONE1_A: DONE1.A U2.9 | length 173.7
  Top Layer w10: DONE1.A 3100,2510 3175.55,2585.55 3201.81,2585.55 U2.9
NetDONE1_K: DONE1.K R7.2 | length 95.5
  Top Layer w10: R7.2 DONE1.K
NetDONE2_K: DONE2.K R9.2 | length 91.5
  Top Layer w10: DONE2.K 3620,2387.44 R9.2
NetIC1_2: IC1.2 L1.2 | length 83.3
  Top Layer w14.5: L1.2@2481.94,3272.8 IC1.2
NetIC1_3: IC1.3 R1.2 | length 64.2
  Top Layer w10: R1.2 2510.2,3225.71 2512.87,3228.39 2512.87,3228.58 2531.5,3247.2 IC1.3
NetJ1_1: J1.1 Y1.1 | length 166.6
  Top Layer w10: J1.1 Y1.1@2356.61,3290
NetL2_2: L2.2 R4.2 | length 54.9
  Top Layer w14: R4.2 L2.2
NetL3_1: L3.1 R3.2 Y2.3 | length 298.7
  Top Layer w10: Y2.3 3682.13,3332.44 L3.1 3767.13,3334.57 R3.2
NetL4_1: L4.1 R2.1 Y2.1 | length 278.9
  Top Layer w10: R2.1 3485.43,3325 L4.1 Y2.1
NetR2_2: R2.2 U1.8 | length 102.3
  Top Layer w10: U1.8@3257.44,3327.24 3261.3,3323.39 U1.8 3355.83,3323.39 R2.2@3357.44,3325
NetR6_2: R6.2 U2.8 | length 128.2
  Top Layer w10: R6.2 3125,2580 3146.38,2601.38 U2.8
PIN10: U2.10
PIN11: U2.11
PIN13: U2.13
PIN14: U2.14
PIN15: U2.15
PIN16: U2.16
PIN17: U2.17
PIN18: U2.18
PIN19: U2.19
PIN20: U2.20
PIN21: U2.21
PIN22: U2.22
PIN23: U2.23
PIN24: U2.24
PIN27: U2.27
PIN28: DONE2.A U2.28 | length 226.8
  Top Layer w10: U2.28 3609.37,2585.63 3620,2575 DONE2.A
PIN29: R10.2 S2.3 S2.4 U2.29 | length 771
  Top Layer w10: U2.29 3738.62,2601.38 3775,2565 3775,2520.79 S2.3 S2.4 4143.5,2519.06 R10.2
PIN30: U2.30 U4.3 | length 411.8
  Top Layer w10: U2.30 3452.72,2617.13 3453.27,2617.68 U4.3
PIN31: U2.31
PIN32: U2.32
PIN33: U2.33
PIN34: U2.34
PIN35: U2.35
PIN40: IC2.3 U2.40 | length 943.6
  Top Layer w10: U2.40 3359.37,2859.37 3410,2910 3635,2910 3960.95,3235.95 IC2.3
PIN41: IC2.2 U2.41 | length 987.5
  Top Layer w10: U2.41 3343.62,2893.62 3420,2970 3640,2970 3925.64,3255.64 IC2.2
PIN42: U1.2 U2.42 | length 799.2
  Top Layer w10: v1(3030,3295) 3031.4,3296.4 3096,3296.4 U1.2 ; v2(3080,3110) 3125,3110 3327.87,2907.13 U2.42
  Bottom Layer w10: v1(3030,3295) 2995,3260 2995,3195 v2(3080,3110)
PIN43: IC1.11 U2.43 | length 963.9
  Top Layer w10: IC1.11 2752.8,3272.8 2775,3295 v1(2805,3295) ; v2(2980,3015) 3155,3015 3312.13,2857.87 U2.43
  Bottom Layer w10: v1(2805,3295) 2875,3225 2875,3120 v2(2980,3015)
PIN44: IC1.9 U2.44 | length 959.7
  Top Layer w10: IC1.9 2714.8,2995 2809.8,2900 3220,2900 3296.38,2823.62 U2.44
PIN45: IC1.8 U2.45 | length 932.7
  Top Layer w10: IC1.8 2678.39,2990 2798.39,2870 3210,2870 3280.55,2799.45 3280.55,2743.19 U2.45
PIN46: IC1.7 U2.46 | length 941.7
  Top Layer w10: IC1.7 2652.8,2972.2 2785,2840 3205,2840 3264.8,2780.2 3264.8,2743.19 U2.46
PIN47: IC1.4 U2.47 | length 1344.1
  Top Layer w10: IC1.4 2553.39,3221.61 2551.5,3219.72 2551.5,3161.66 2385,2995.17 2385,2900 2475,2810 3202.36,2810 3249.06,2763.31 3249.06,2743.19 U2.47
TCK: P4.1 R5.2 U2.5 | length 1061.8
  Top Layer w10: P4.1 2384.57,2732.87 R5.2 2665.14,2732.44 2748.96,2648.62 U2.5
TDI: P4.2 U2.6 | length 1026.9
  Top Layer w10: P4.2 U2.6
TDO: P4.3 U2.7 | length 1061.8
  Top Layer w10: P4.3 2662.87,2532.87 2747.13,2617.13 U2.7
TMS: P4.4 U2.4 | length 1181.3
  Top Layer w10: P4.4 2178.56,2436.44 2361.44,2436.44 v2(2365,2440) ; v2(2900,2735) 2970.63,2664.37 U2.4
  Bottom Layer w10: v2(2365,2440) 2425,2440 2720,2735 v2(2900,2735)
VCC: C16.2 C18.2 C19.2 C20.2 C29.2 C30.2 C31.2 PWR1.A S1.3 U3.1 U5.1 U5.3 | length 1519
  Top Layer w10: U5.3 U5.3@4522.72,3232.4 ; C29.2 C30.2 C31.2 4527.56,3092.44 4505,3115 U5.1 4522.72,3157.6 4544.53,3179.41 4544.53,3210.59 U5.3@4522.72,3232.4 ; C29.2@4528.39,2914.17 U3.1 4559.88,2835.12 4585,2810 4585,2575 4532.56,2522.56 C16.2 C18.2 C19.2 C20.2 ; S1.3 4842.52,3320 PWR1.A 4581.93,3232.4 U5.3@4522.72,3232.4
VCC_BAT: B1.1 B1.2 C10.2 P3.1 S1.2 | length 3932.2
  Top Layer w10: P3.1 4974.96,2235 B1.2 4995.04,2225 v2(5185,2225) ; B1.1 4981.26,3106.26 S1.2 5036.26,3315 C10.2
  Bottom Layer w10: S1.2 4981.26,2683.74 5185,2480 v2(5185,2225)
pads on no net: IC1.14 S1.0 S1.1 U2.38 U2.39 U3.2 U3.3 U3.6 U3.7 U4.1 U5.4
copper on no net:
  other v1: 5375,2248.85 5375,2297.69 5375,2346.54 5375,2395.38 5375,2444.23 5375,2493.08 5375,2541.92 5375,2590.77 5375,2639.61 5375,2688.46 5375,2737.31 5375,2786.15 5375,2835 5375,2883.85 5375,2932.69 5375,2981.54 5375,3030.38

## Polygon pours and split planes (outlines as drawn)
GND on Bottom Layer "NONET_L-01_P-001" (solid, pour order 8): 2115,3565 2115,2100 5420,2100 5425,2105 5420,2110 5420,3565
GND on Top Layer "NONET_L-01_P-001" (solid, pour order 7): 2115.2,3565 2115.2,2100 5425,2100 5425,3565
no net on Top Layer "NONET_L-01_P-001" (solid, pour order 6): 4885,3490 4885,3420 4905,3400 4935,3430 5065,3430 5065,3490 5040,3515 5020,3495 4910,3495
no net on Top Layer "NONET_L-01_P-001" (solid, pour order 5): 5280,3490 5330,3440 5330,3405 5125,3405 5085,3445 5130,3490 5300,3490 5300,3470 5270,3440 5265,3445 5125,3445
3V3 on VCC_3V3 (split plane): 5404.9,2120.1 2135.29,2120.1 2135.29,3140 3130,3140 3130,3340 2580,3340 2580,3440 2135.29,3440 2135.29,3544.9 5404.9,3544.9
1V2 on VCC_1V2 (split plane): 5404.9,2120.1 2135.29,2120.1 2135.29,3140 3130,3140 3130,3440 2135.29,3440 2135.29,3544.9 5404.9,3544.9

## Other copper
Top Layer:
  region net NetJ1_1: 2260,3314.33 2260,3265 2356.61,3265 2356.61,3314.33
VCC_3V3 (plane layer: these items are gaps in the copper):
  region: 2580,3340 3130,3340 3130,3140 2580,3140
  region: 3215,2730 3215,2520 3430,2520 3430,2525 3430,2730
  region: 2115,3440 2115,3140 2580,3140 2580,3440
VCC_1V2 (plane layer: these items are gaps in the copper):
  region: 3215,2730 3215,2520 3430,2520 3430,2730
  region: 3130,3440 3130,3140 2115,3140 2115,3440

## Silkscreen, mask and mechanical layers (free items; w line width, h text height)
Top Overlay:
  text "Parallel Downlink" at 2149.49,3442.42 h40
Mechanical 13:
  lines w10: 2115.2,2100 2115.2,3496.85 2115.2,3565 5425,3565 5425,2100 2115.2,2100

## Text inside footprints (layer, text, board x,y; h text height)
J1: Mechanical 13 "PCB EDGE" at 2170,3125 h40 r270